# EAGLE board omni (EAGLE 9.6.2)
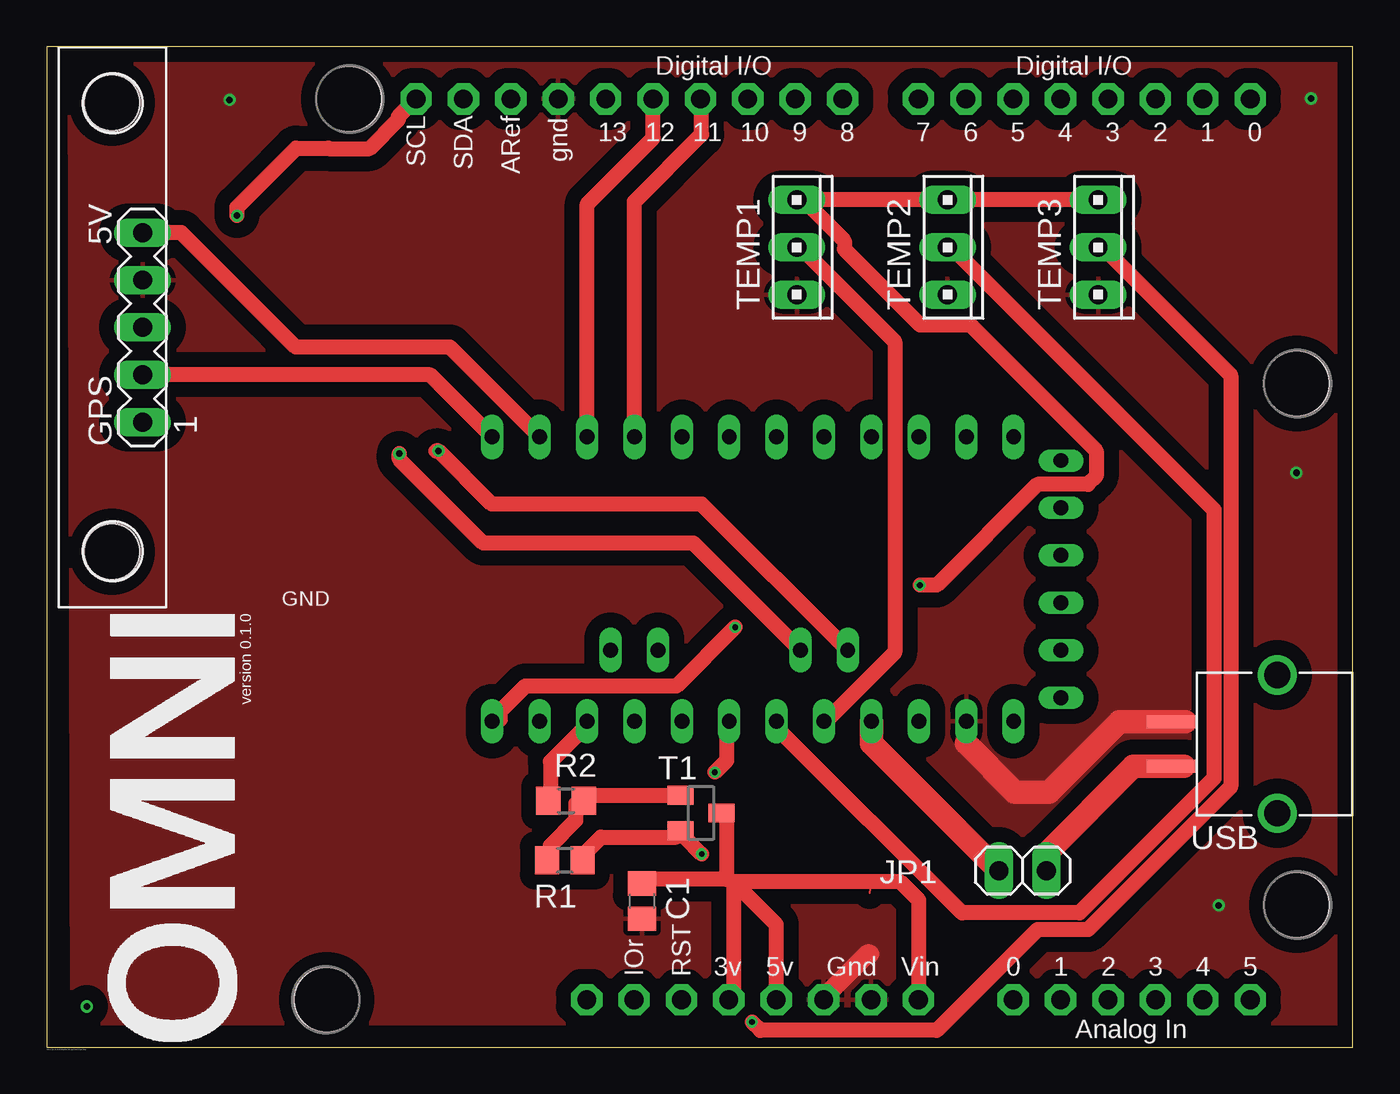
[diagram p0: board, top side]
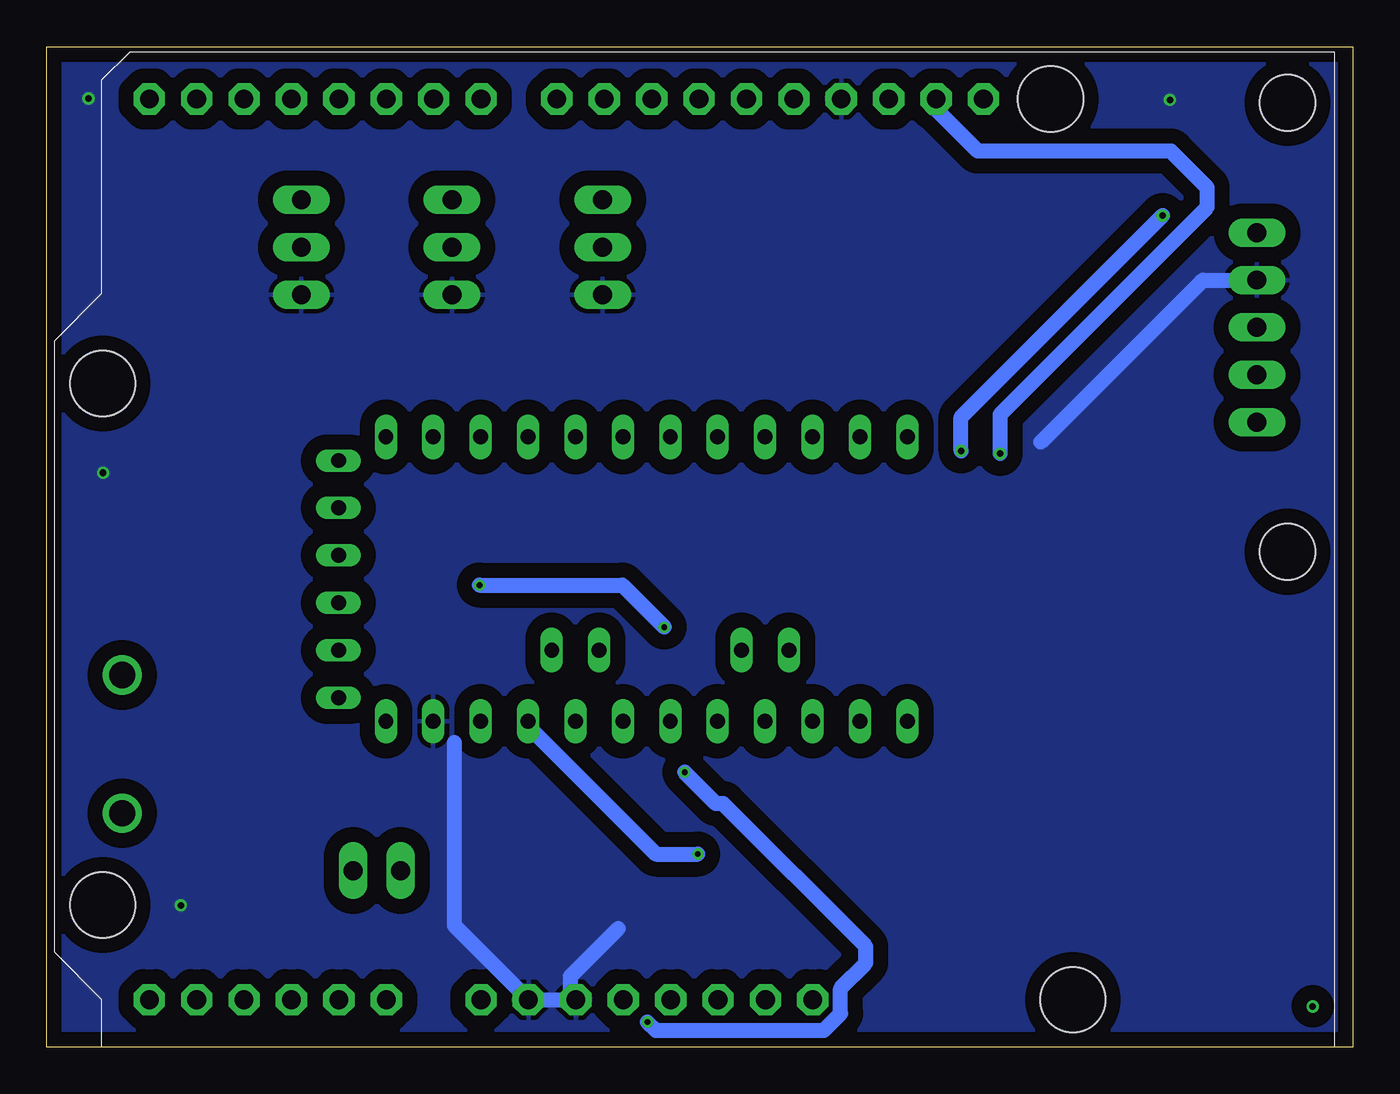
[diagram p1: board, bottom side, seen from below]

Size 70 x 53.6 mm. Coordinates in mm from the lower left corner, seen from the top.
Outline: 0,0 70,0 70,53.6 0,53.6 0,0
Copper layers (1*16): Top 0.035mm / dielectric 1.53mm / Bottom 0.035mm
Design rules "pban_4mil-l2 *": minimum track width 0.8mm, minimum drill 0.3mm, track to track 0.1mm, track to pad 0.229mm, pad to pad 0.1mm, via to via 0.1mm, smd to smd 0.1mm, copper to edge 0.5mm, drill to drill 0.5mm, minimum pad ring 0.15mm, minimum via ring 0.15mm, stop-mask expansion 4mil, vias tented up to drill 0.35mm, thermal gap 10mil
Holes 3.5 mm at 16.2,50.8 15,2.54 67,7.62 67,35.56
Holes 3 mm at 3.5,50.6 3.5,26.55

## Footprints (pad centres in the part's own frame; a part is rotated, then mirrored left to right if it is on the bottom)
C0805 = smd 1.3 x 1.5: 1 -0.95,0; 2 0.95,0
MA05-1 = drill 1.016 long: 1 -5.08,0; 2 -2.54,0; 3 0,0; 4 2.54,0; 5 5.08,0
1X02 = drill 1.016 long: 1 -1.27,0; 2 1.27,0
ARDUINOR3-BPLACE = drill 1 pad 1.676 octagon: 3V 35.56,2.54; 5V 38.1,2.54; A0 50.8,2.54; A1 53.34,2.54; A2 55.88,2.54; A3 58.42,2.54; A4 60.96,2.54; A5 63.5,2.54; AREF 23.876,50.8; D0 63.5,50.8; D1 60.96,50.8; D2 58.42,50.8; D3 55.88,50.8; D4 53.34,50.8; D5 50.8,50.8; D6 48.26,50.8; D7 45.72,50.8; D8 41.656,50.8; D9 39.116,50.8; D10 36.576,50.8; D11 34.036,50.8; D12 31.496,50.8; D13 28.956,50.8; GND 26.416,50.8; GND1 43.18,2.54; GND2 40.64,2.54; IOREF 30.48,2.54; RESERVED 27.94,2.54; RESET 33.02,2.54; SCL 18.796,50.8; SDA 21.336,50.8; VIN 45.72,2.54
R0805 = smd 1.3 x 1.5: 1 -0.95,0; 2 0.95,0
SOT23 = smd 1 x 1.4: 1 -0.95,-1.1; 2 0.95,-1.1; 3 0,1.1
10X03MTA = drill 1.016 long: 1 2.54,0; 2 0,0; 3 -2.54,0
PRO-MINI-2 = drill 0.8 long: A0 6.35,2.54; A1 6.35,0; A2 6.35,-2.54; A3 6.35,-5.08; A4 2.54,1.27; A5 2.54,3.81; A6 2.54,-8.89; A7 2.54,-6.35; D2 -8.89,2.54; D3 -8.89,0; D4 -8.89,-2.54; D5 -8.89,-5.08; D6 -8.89,-7.62; D7 -8.89,-10.16; D8 -8.89,-12.7; D9 -8.89,-15.24; D10 6.35,-15.24; D11 6.35,-12.7; D12 6.35,-10.16; D13 6.35,-7.62; DTR 5.08,15.24; GND 6.35,10.16; GND1 -8.89,5.08; GND2 -7.62,15.24; GND3 -5.08,15.24; RAW 6.35,12.7; RST 6.35,7.62; RST1 -8.89,7.62; RX1 -8.89,10.16; RX1-1 0,15.24; TX0 -8.89,12.7; TX0-1 2.54,15.24; VCC 6.35,5.08; VCC1 -2.54,15.24
MICROUSBCON = smd 0.7 x 2.7: 5V 1.2,-1.35; GND -1.2,-1.35 | drill 1.4: SHIELD1 -3.7,4.3; SHIELD2 3.7,4.3

## Placement (x,y rotation side)
C1  [C0805]  31.9,7.83 270 top
GPS  AE-GYSFDMAXB  [MA05-1]  5.14,38.56 90 top
JP1  [1X02]  52.3,9.46 0 top
LTE_LORA  ARDUINOR3-BPLACE  [ARDUINOR3-BPLACE]  1,0 0 top
R1  [R0805]  27.77,10.01 180 top
R2  [R0805]  27.84,13.21 0 top
T1  [SOT23]  35.07,12.55 270 top
TEMP1  [10X03MTA]  40.2,42.85 270 top
TEMP2  [10X03MTA]  48.28,42.85 270 top
TEMP3  [10X03MTA]  56.35,42.85 270 top
U$1  PRO-MINI-2  [PRO-MINI-2]  39.12,23.81 270 top
USB  [MICROUSBCON]  61.65,16.24 270 top

## Library data of the parts
C1 R1 R2 = rcl
GPS = OMNI; OC_FARNELL: unknown; OC_NEWARK: unknown
JP1 = pinhead
LTE_LORA = adafruit
T1 = microchip
TEMP1-TEMP3 = con-amp
U$1 = Arduino-clone
USB = OMNI

## Nets
GND: C1.2 GPS.4 LTE_LORA.GND LTE_LORA.GND1 LTE_LORA.GND2 TEMP1.1 TEMP2.1 TEMP3.1 U$1.GND USB.GND
N$1: GPS.2 U$1.D9
N$2: GPS.5 U$1.D8
N$3: TEMP1.2 U$1.A0
N$4: C1.1 LTE_LORA.3V LTE_LORA.5V LTE_LORA.VIN T1.3
N$6: TEMP2.2 U$1.A1
N$9: TEMP1.3 TEMP2.3 TEMP3.3 U$1.D10
N$12: JP1.2 USB.5V
N$13: LTE_LORA.SDA U$1.A4
N$14: LTE_LORA.SCL U$1.A5
N$15: LTE_LORA.D12 U$1.D7
N$16: LTE_LORA.D11 U$1.D6
N$19: LTE_LORA.A0
S$1: R1.2 R2.2 T1.1
S$3: R2.1 U$1.D12
S$4: TEMP3.2 U$1.A2
V+: JP1.1 R1.1 T1.2 U$1.VCC

## Tracks (layer width: path | path; a pad name or v marks a point on that pad's centre or on a via)
GND  (via drill 0.35)
  Top 1.016: 44.1,2.62 LTE_LORA.GND1 | 44.1,5 43.99,5 41.64,2.65 LTE_LORA.GND2
  Top 1.27: 49.28,16.27 51.9,13.65 53.7,13.65 57.49,17.44 USB.GND 61.01,17.44
  Bottom 0.813: 44.45,2.54 LTE_LORA.GND1 | 39.37,6.35 41.94,3.78 41.94,2.84 LTE_LORA.GND2 LTE_LORA.GND1 | 16.72,32.42 8.04,41.1 GPS.4 | 48.15,16.33 48.15,6.51 LTE_LORA.GND1
  other vias: 9.81,50.75 62.81,7.6 66.98,30.77 67.76,50.82
  pour Top (isolate 0.8): 69.15,52.97 69.4,52.72 69.4,1.27 1.36,1.27 1.24,52.97
  pour Bottom (isolate 0.8): 0.67,53.04 69.24,53.04 69.63,52.65 69.63,0.96 69.34,0.67 0.77,0.67 0.67,0.77
N$1
  Top 0.813: U$1.D9 20.56,36.02 GPS.2
N$2
  Top 0.813: U$1.D8 21.62,37.5 13.35,37.5 7.21,43.64 GPS.5
N$3
  Top 0.8: U$1.A0 41.85,17.55 45.45,21.15 45.45,37.8 40.5,42.75 TEMP1.2
N$4
  Top 0.1: 44.1,8.25 44.12,8.5 44.12,8.89
  Top 0.8: 36.45,9 36.45,12.15 T1.3 | 36.45,9 31.95,9 C1.1 | 36.45,9 36.83,8.83
  Top 0.813: LTE_LORA.3V 36.83,2.81 36.83,8.83 | LTE_LORA.VIN 46.72,7.89 45.72,8.89 44.12,8.89 36.77,8.89 36.83,8.83 | 36.83,8.83 39.1,6.56 LTE_LORA.5V
N$6
  Top 0.8: U$1.A1 39.15,17.1 49.05,7.2 55.35,7.2 62.55,14.4 62.55,28.8 48.6,42.75 TEMP2.2
N$9  (via drill 0.3)
  Top 0.8: v36.9,22.5 33.75,19.35 25.65,19.35 24.3,18 24.3,17.55 U$1.D10 | v46.8,24.75 47.7,24.75 53.1,30.15 55.8,30.15 56.25,30.6 56.25,31.95 49.5,38.7 46.8,38.7 42.75,42.75 42.75,43.2 40.5,45.45 TEMP1.3
  Top 0.813: 40.5,45.45 40.5,45.39 TEMP2.3 TEMP3.3
  Bottom 0.8: v36.9,22.5 39.15,24.75 v46.8,24.75
N$12
  Top 1.27: JP1.2 53.57,10.37 58.24,15.04 USB.5V 60.94,15.04
N$13  (via drill 0.35)
  Top 0.813: U$1.A4 34.66,27 23.4,27 18.9,31.5 v18.9,31.8
  Bottom 0.813: v18.9,31.8 18.9,33.9 7.8,45 7.8,46.05 9.75,48 20.1,48 22.34,50.24 LTE_LORA.SDA
N$14  (via drill 0.35)
  Top 0.813: U$1.A5 35.1,29.1 23.85,29.1 v21,31.95 20.85,31.95 | v10.2,44.55 10.2,45 13.36,48.16 15.09,48.16 15.1,48.14 17.3,48.14 18.86,49.7 18.86,49.86 LTE_LORA.SCL
  Bottom 0.813: v21,31.95 21,33.75 v10.2,44.55
N$15
  Top 0.813: U$1.D7 28.96,45.16 32.5,48.7 LTE_LORA.D12
N$16
  Top 0.813: U$1.D6 31.5,45.3 35.1,48.9 35.1,50.74 LTE_LORA.D11
S$1
  Top 0.8: T1.1 33.75,13.5 28.8,13.5 R2.2 28.35,13.05 28.35,12.15 27,10.8 27,10.35 R1.2
S$2  (via drill 0.35)
  other vias: 2.15,2.18
S$3
  Top 0.8: R2.1 27,13.5 27,15.3 28.8,17.1 U$1.D12
S$4  (via drill 0.3)
  Top 0.8: v35.81,14.73 36.45,15.37 36.45,17.1 U$1.A2 | v37.8,1.35 38.25,0.9 47.7,0.9 53.1,6.3 55.8,6.3 63.45,13.95 63.45,36 56.7,42.75 TEMP3.2
  Bottom 0.8: v35.81,14.73 34.13,13.05 33.75,13.05 26.1,5.4 26.1,4.5 27.45,3.15 27.45,1.8 28.35,0.9 37.35,0.9 v37.8,1.35
V+  (via drill 0.3)
  Top 0.8: R1.1 28.8,10.35 29.7,11.25 33.75,11.25 T1.2 34.2,11.25 v35.1,10.35
  Top 1.27: JP1.1 44.2,16.29 U$1.VCC
  Bottom 0.8: v35.1,10.35 37.35,10.35 44.1,17.1 U$1.VCC

## Text on the board
tPlace: version 0.1.0 | /Users/yamamoto/Dropbox/design/omni/logo.bmp
tNames: GND